# Altium PCB pcb.PcbDoc
Units mm, origin at the board's own origin, x right, y up, seen from the top; angles counter-clockwise.
Board outline 20 x 20 mm, 2 copper layers (Top Layer, Bottom Layer), stack 1.671 mm thick; 7 components, 5 nets, 14 pads, 1 vias.
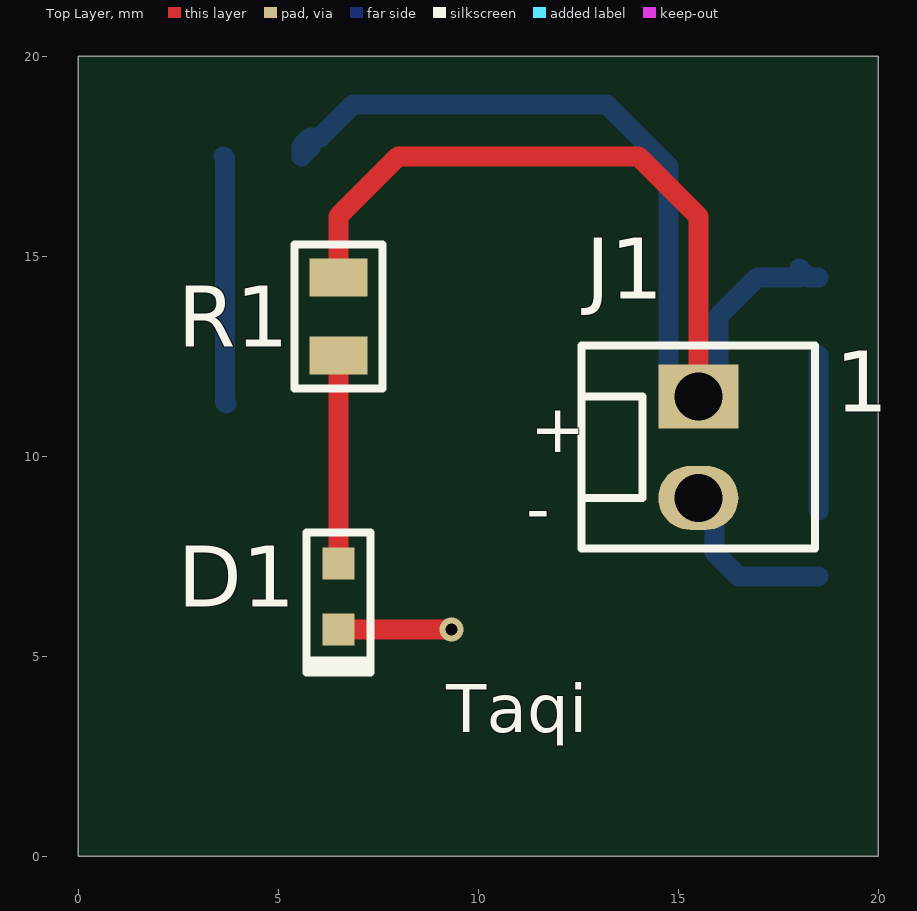
[diagram p0: Top Layer view]
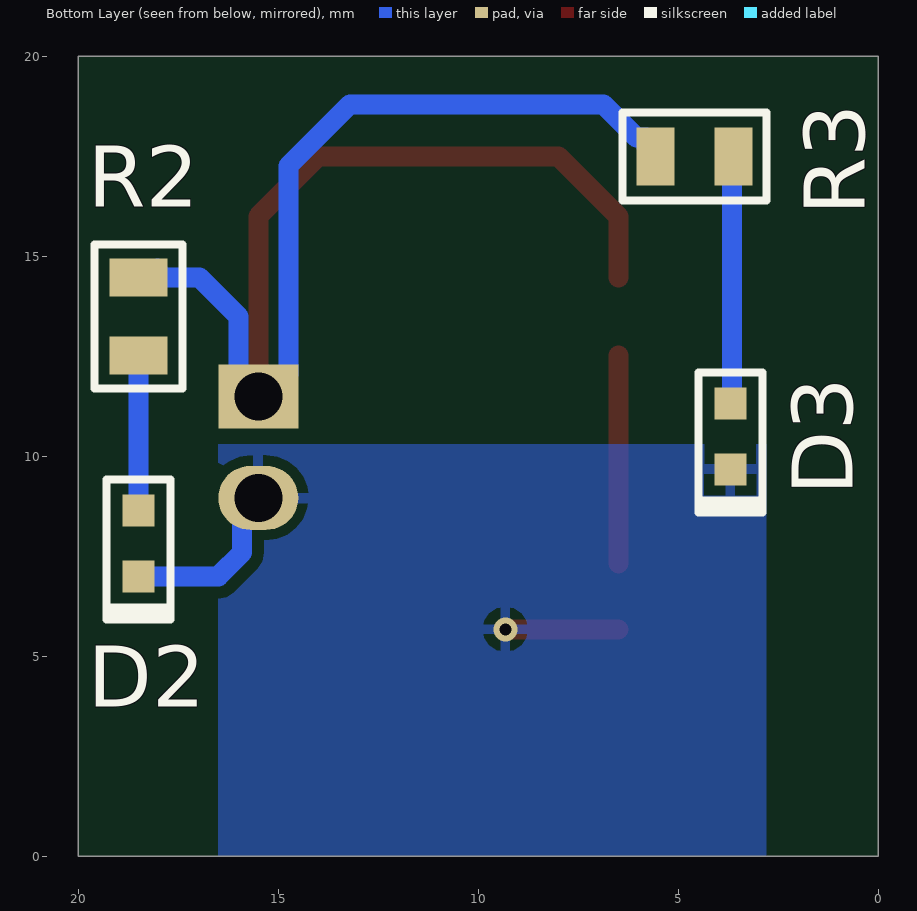
[diagram p1: Bottom Layer view, seen from below]
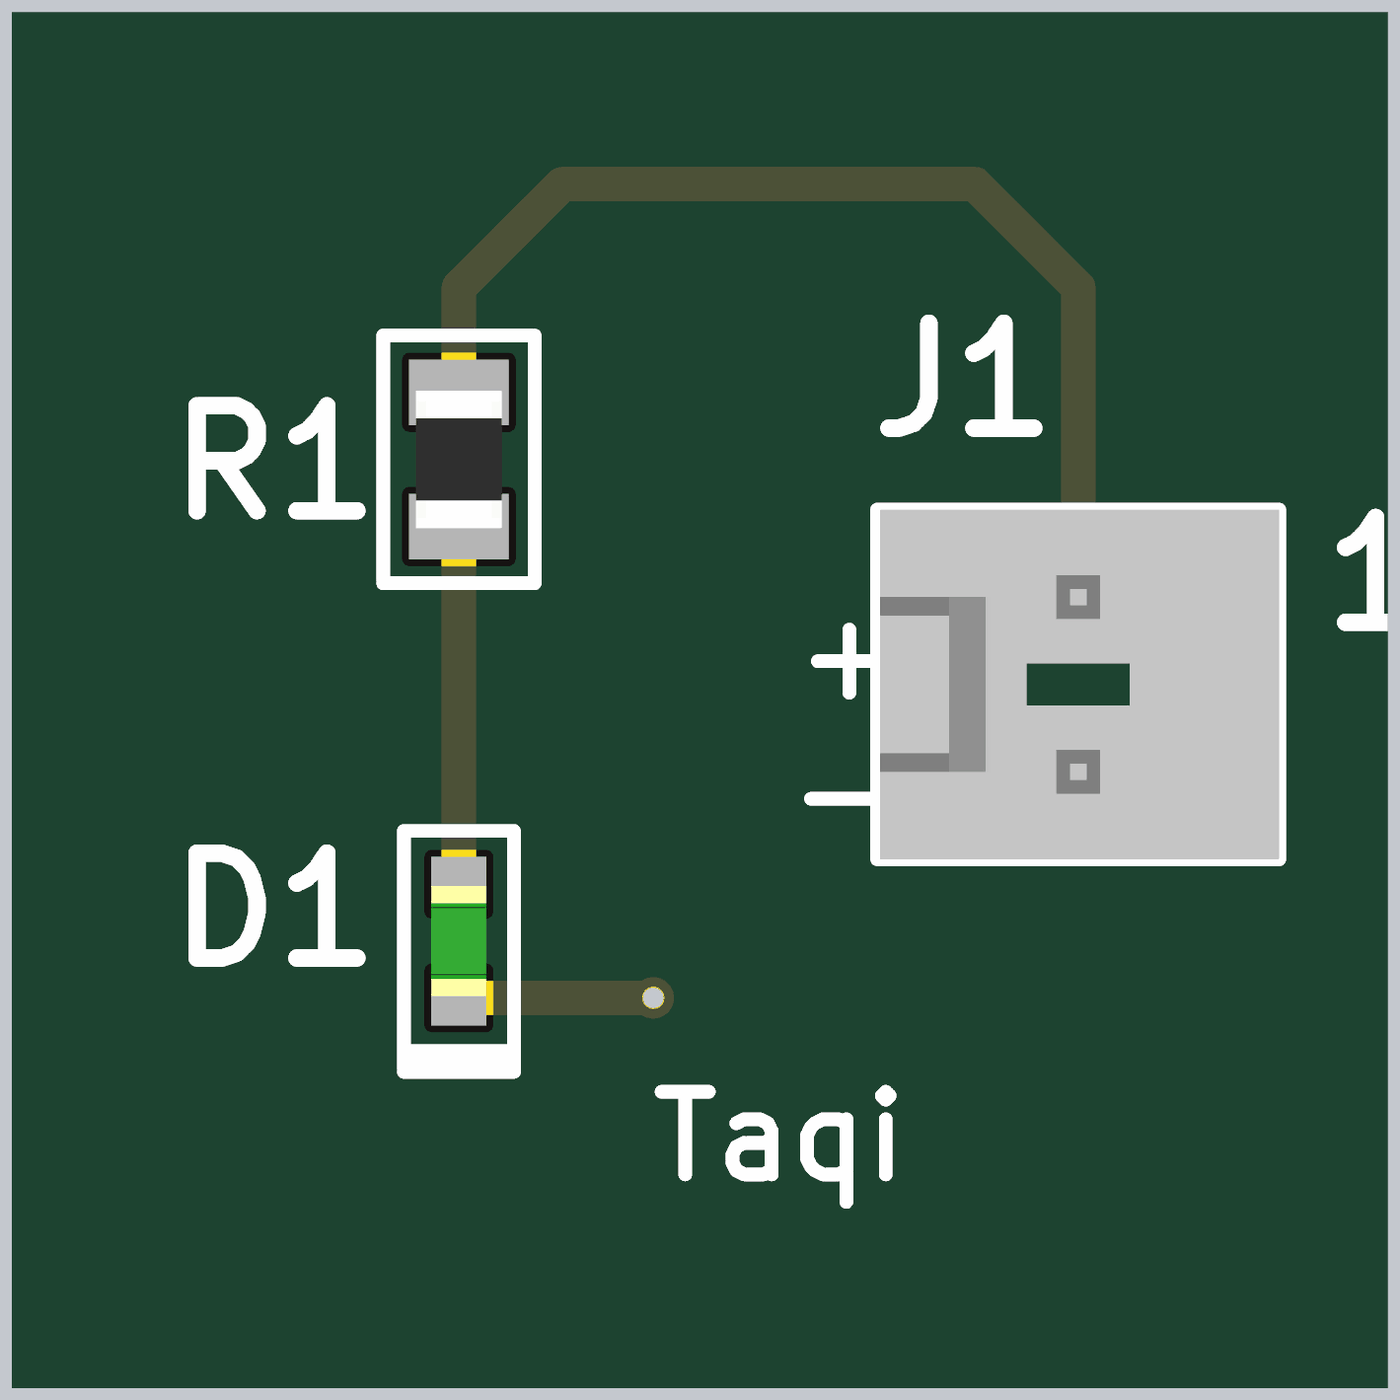
[diagram p2: 3D render of the assembled board from above, using the file's embedded part models]
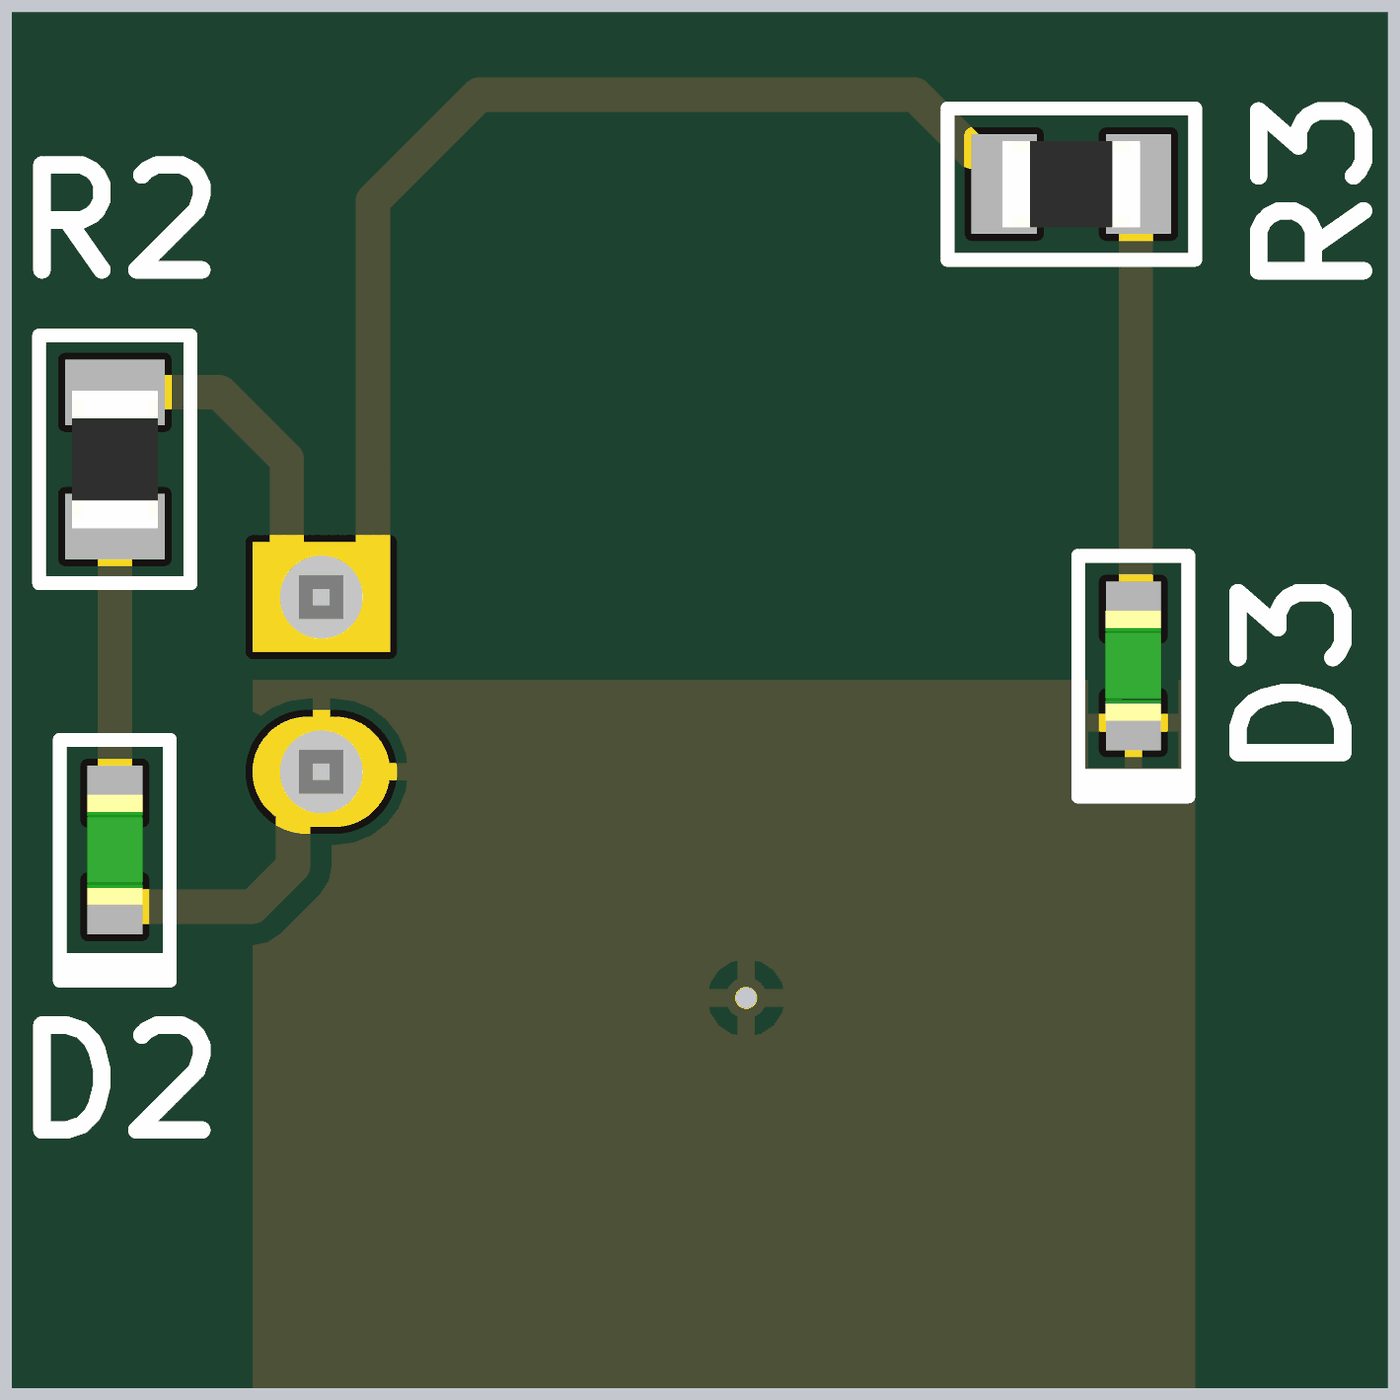
[diagram p3: 3D render of the assembled board from below, using the file's embedded part models]

## Layer stack, top to bottom
Top Solder: solder mask 0.0102, Solder Resist, Dk 3.5
Top Layer: signal copper 0.0356
Dielectric 1: dielectric 1.6, FR-4, Dk 4.8
Bottom Layer: signal copper 0.0356
Bottom Solder: solder mask 0.0102, Solder Resist, Dk 3.5

## Board outline
0,20 20,20 20,0 0,0

## Design rules (kind name [scope] priority, off if disabled: settings)
Clearance [All] p1: gap=0.3 ignorepadtopadclearanceinfootprint=FALSE
PolygonConnect [All] p1: connectstyle=Relief reliefconductorwidth=0.254 reliefentries=4 polygonreliefangle="90 Angle" airgapwidth=0.254
RoutingVias [All] p1: holewidth=0.3 width=0.6 viastyle="Through Hole" minholewidth=0.3 minwidth=0.6 maxholewidth=0.3 maxwidth=0.6
SilkToSolderMaskClearance [IsPad] p1: minsilkscreentomaskgap=0.1 clearancetoexposedcopper=TRUE
SolderMaskExpansion [All] p1: expansion=0.102 istentingtop=FALSE
Width [All] p1: maxlimit=1 minlimit=0.3 preferedwidth=0.5
29 further rules are at their usual default settings.

## Components (designator, comment, footprint, x,y, rotation, side; value= is the part's Value field where it differs from the comment)
D1 "GREEN" LED0603G 6.5,6.5 r90 top
D2 "GREEN" LED0603G 18.5,7.825 r90 bottom
D3 "GREEN" LED0603G 3.7,10.5 r90 bottom
J1 "1x2 Header" HDR1X2 15.5,11.5 r0 top
R1 "360R" R0805 6.5,13.5 r90 top
R2 "360R" R0805 18.5,13.5 r90 bottom
R3 "360R" R0805 4.6,17.5 r0 bottom

## Footprints (in the part's own frame and the unit in brackets; to place one, negate y for a bottom-side part, rotate by r counter-clockwise, add the part's x,y. Pads: shape width x height; smd on the part's side, far side on the other; paste and mask are expansions set on the pad)
HDR1X2 [mm]
  rect 2x1.6 hole 1.2: 1(0,0)
  oval 2x1.6 hole 1.2: 2(0,-2.54)
  silkscreen extent -2.92,-3.81 2.92,1.27, body extent -2.88,-3.81 2.92,1.27, height 11.07
LED0603G [mm]
  rect 0.8x0.8 smd: 1(-0.825,0) 2(0.825,0)
  silkscreen extent -1.9,-0.8 1.6,0.8, body extent -0.8,-0.4 0.8,0.4, height 0.4
R0805 [mm]
  rect 0.95x1.45 smd: 1(-0.975,0) 2(0.975,0)
  silkscreen extent -1.8,-1.1 1.8,1.1, body extent -1,-0.62 1,0.62, height 0.61

## Part data
D1 D2 D3: library part LNJ337W83RA, "LED GREEN ESS II SMD", Case Code (Imperial)=0603, Case Code (Metric)=1608, Color=Green,Yellow, Forward Current=20mA, Forward Voltage=1.95V, Illumination Color=Green, Manufacturer="Panasonic SSG", Max Operating Temperature=85°C, Max Power Dissipation=55mW, Min Operating Temperature=-30°C, Package Quantity=1, Reverse Voltage=4V, Supplier Part Number 1=1908053, Test Current=5mA, Case/Package=0603, Category=LEDs, ComponentLink1Description=https://datasheet.ciiva.com/6868/lnj337w83ra-aek-6868817.pdf?src-supplier=Newark, ComponentLink1URL=https://datasheet.ciiva.com/6868/lnj337w83ra-aek-6868817.pdf?src-supplier=Newark, ComponentLink2Description=https://datasheet.ciiva.com/4690/lnj337w83ra-aek-226051-4690026.pdf?src-supplier=Mouser, ComponentLink2URL=https://datasheet.ciiva.com/4690/lnj337w83ra-aek-226051-4690026.pdf?src-supplier=Mouser, ComponentLink3Description=https://datasheet.ciiva.com/11775/0900766b80f0a8bb-11775418.pdf?src-supplier=RSComponents, ComponentLink3URL=https://datasheet.ciiva.com/11775/0900766b80f0a8bb-11775418.pdf?src-supplier=RSComponents, Dominant Wavelength=572nm, Height=0.2mm, Lead Free="Lead Free", Length=1.6mm, Lens Style=Rectangular, Luminous Intensity=7.5mcd, Manufacturer Part Number=LNJ337W83RA, Mount="Surface Mount", Number of LEDs=1, Number of Pins=2, Packaging="Tape and Reel", Pricing 1="5=0,28600, 25=0,27600, 100=0,14900, 250=0,14500, 500=0,11700, 1000=0,09060 (EUR)", REACH SVHC=Yes, RoHS=Yes, Supplier 1=Farnell, Wavelength=572nm, Width=0.8mm
J1: library part 22-29-2021, "Conn Wire to Board HDR 2 POS 2.54mm Solder ST Thru-Hole Bag", Color=White, Flammability Rating="UL94 V-0", Insulation Color=Natural, Manufacturer=Molex, Max Operating Temperature=80°C, Supplier Part Number 1=WM2744-ND, Voltage Rating (DC)=250V, Cataogry=Connectors, Category="Headers and Wire Housings", ComponentLink1Description=https://datasheet.ciiva.com/70131/022292021-sd-70131706.pdf?src-supplier=Digi-Key, ComponentLink1URL=https://datasheet.ciiva.com/70131/022292021-sd-70131706.pdf?src-supplier=Digi-Key, Connector Type="Header,Male Pin", Contact Material=Brass, Contact Mating Length=0.295inch, Contact Plating=Gold, Contact Post Length=0.14inch, Contact Shape=Square, Fastening Type=Friction, Gender=Male, Glow Wire Compliant=Non-compliant, Halogen Free="Low Halogen", Insulation Height=0.461inch, Insulation Material=Nylon, Lead Free="Lead Free", Manufacturer Part Number=22-29-2021, Mount="Through Hole", Number of Positions=2, Number of Rows=1, Packaging=Bag, Pricing 1="1=0,48000, 10=0,45200, 100=0,31630, 500=0,27112, 1000=0,22593, 5000=0,19365, 10000=0,18074 (USD)", RoHS=Yes, Stock 1=9069, Supplier 1=Digi-Key, Termination=Solder
R1 R2 R3: library part CRCW0805360RFKEA, "Res Thick Film 0805 360 Ohm 1% 0.125W(1/8W) ±100ppm/C Molded SMD Automotive Paper T/R", Case Code (Imperial)=0805, Case Code (Metric)=2012, Manufacturer=Vishay, Max Operating Temperature=155°C, Max Power Dissipation=125mW, Min Operating Temperature=-55°C, Package Quantity=10, Supplier Part Number 1=541-360CCT-ND, Temperature Coefficient=100ppm/°C, Tolerance=1%, Voltage Rating=150V, Case/Package=0805, Category="Chip SMD Resistors", ComponentLink1Description=https://datasheet.ciiva.com/2467/dcrcwe3-2467773.pdf?src-supplier=Digi-Key, ComponentLink1URL=https://datasheet.ciiva.com/2467/dcrcwe3-2467773.pdf?src-supplier=Digi-Key, Composition="Thick Film", Contact Plating=Tin, Depth=1.25mm, Features="Automotive AEC-Q200", Height=0.45mm, Lead Free="Lead Free", Length=2mm, Manufacturer Part Number=CRCW0805360RFKEA, Military Standard=Not, Number of Pins=2, Number of Terminals=2, Number of Terminations=2, Packaging="Tape and Reel", Power Rating=125mW, Pricing 1="1=0,10000, 10=0,06200, 100=0,02540, 1000=0,01142, 2500=0,00991 (USD)", Radiation Hardening=No, REACH SVHC=Unknown, Resistance=360R, RoHS=Yes, Stock 1=2466, Supplier 1=Digi-Key, Termination=SMD/SMT, Voltage Rating (DC)=150V, Weight=0.000194oz, Width=0.049inch

## Via types
v1: diameter 0.6, hole 0.3, Top Layer to Bottom Layer, tented both sides, 1 vias

## Nets (pads, with @x,y where several pads share a name; then routed paths per layer and width w, separated by ;. In a path a pad name is that pad's centre, name@x,y a point inside that pad or via, vN(x,y) a via of type N, cw(c..) or ccw(c..) an arc to the next point about the centre after c; other vN are vias at no path point)
+3V3: J1.1 R1.2 R2.2 R3.2 | length 38.7
  Top Layer w0.5: R1.2 6.5,16 8,17.5 14,17.5 15.5,16 J1.1 J1.1@15.3,11.5
  Bottom Layer w0.5: R3.2@5.8,17.725 R3.2 5.575,17.75 5.8,17.975 6.05,17.975 6.875,18.8 13.207,18.8 14.75,17.257 14.75,12.05 15.3,11.5 J1.1 16,12 16,13.5 16.975,14.475 R2.2@18.025,14.475 ; R2.2@18.025,14.7 18.25,14.475 R2.2
Diode1: D1.2 R1.1 | length 5.2
  Top Layer w0.5: D1.2 R1.1
Diode2: D2.2 R2.1 | length 3.9
  Bottom Layer w0.5: D2.2 R2.1
Diode3: D3.2 R3.1 | length 6.2
  Bottom Layer w0.5: R3.1 3.663,17.462 3.663,11.362 D3.2
GND: D1.1 D2.1 D3.1 J1.2 | length 7.5
  Top Layer w0.5: D1.1 v1(9.325,5.675) ; J1.2@15.3,8.96 J1.2
  Bottom Layer w0.5: J1.2@15.44,8.9 J1.2 15.91,8.55 15.91,7.59 16.5,7 D2.1

## Polygon pours and split planes (outlines as drawn)
GND on Bottom Layer "GND_L02_P008" (solid, pour order 8): 2.8,10.3 2.8,0 16.5,0 16.5,10.3
no net on Bottom Layer "NONET_L02_P007" (solid, pour order 7): 0,20
no net on Bottom Layer "NONET_L02_P001" (solid, pour order 1): 10,0.5

## Silkscreen, mask and mechanical layers (free items; w line width, h text height)
Top Overlay:
  text "+" at 11.3,10.1 h1.2
  text "-" at 11.2,8.1 h1.2
  text "Taqi" at 9.2,3.1 h1.2
Boardoutline:
  the board outline again, w0.1

## Text inside footprints (layer, text, board x,y; h text height)
J1: Top Overlay "1" at 18.929,11.119 h1.52